# Altium PCB Controller_PCB_doc.PcbDoc
Units mm, origin at the board's own origin, x right, y up, seen from the top; angles counter-clockwise.
Board outline 152.4 x 101.6 mm, 2 copper layers (Top Layer, Bottom Layer); 35 components, 21 nets, 141 pads, 11 vias.
Unrouted connection lines stored in the file: 5.
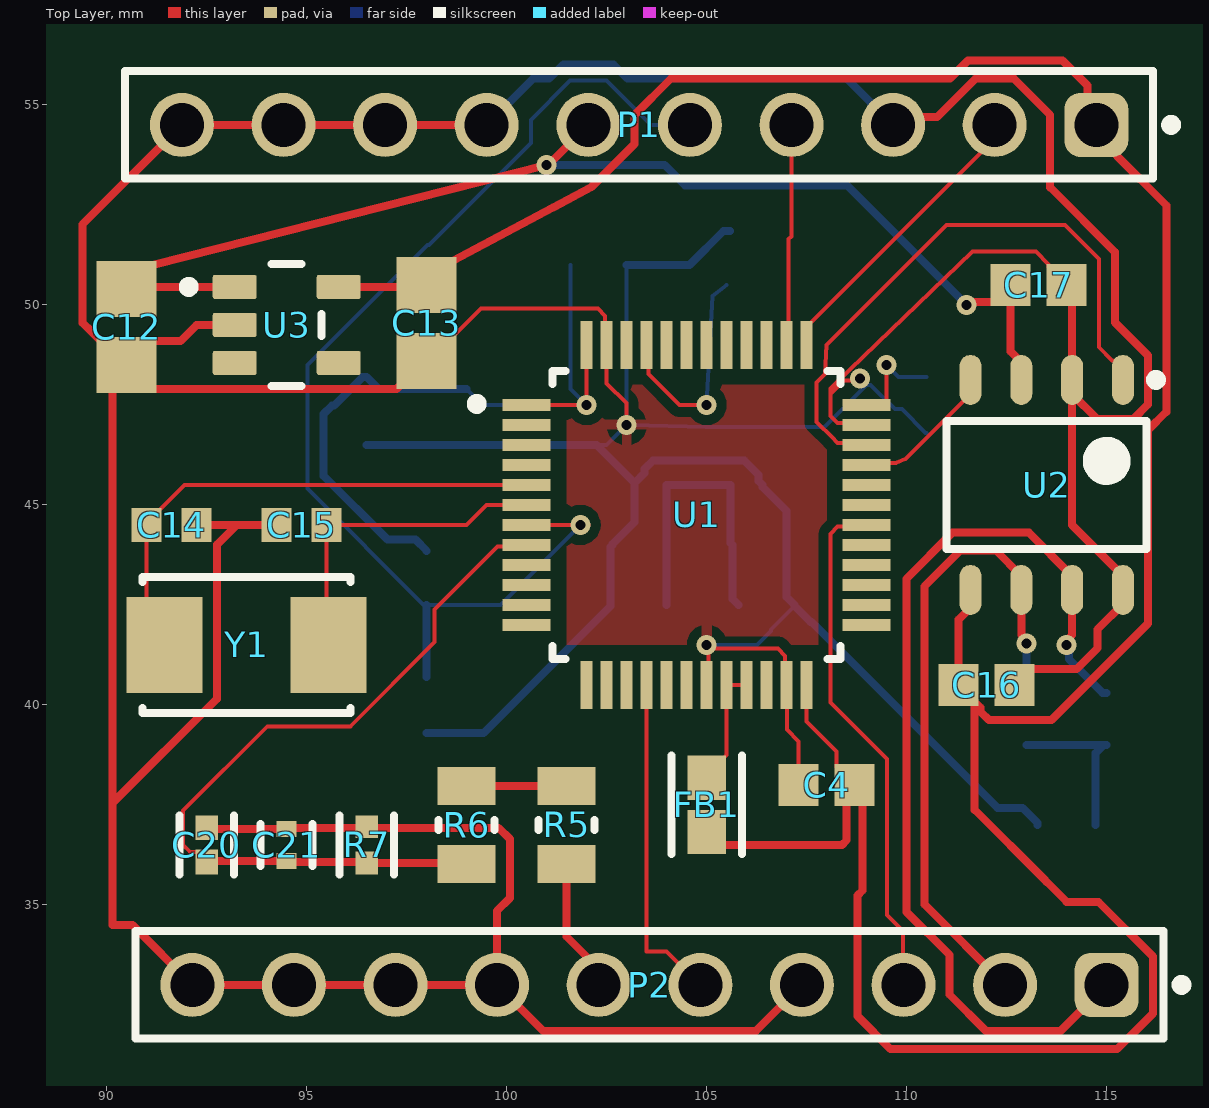
[diagram p0: Top Layer view]
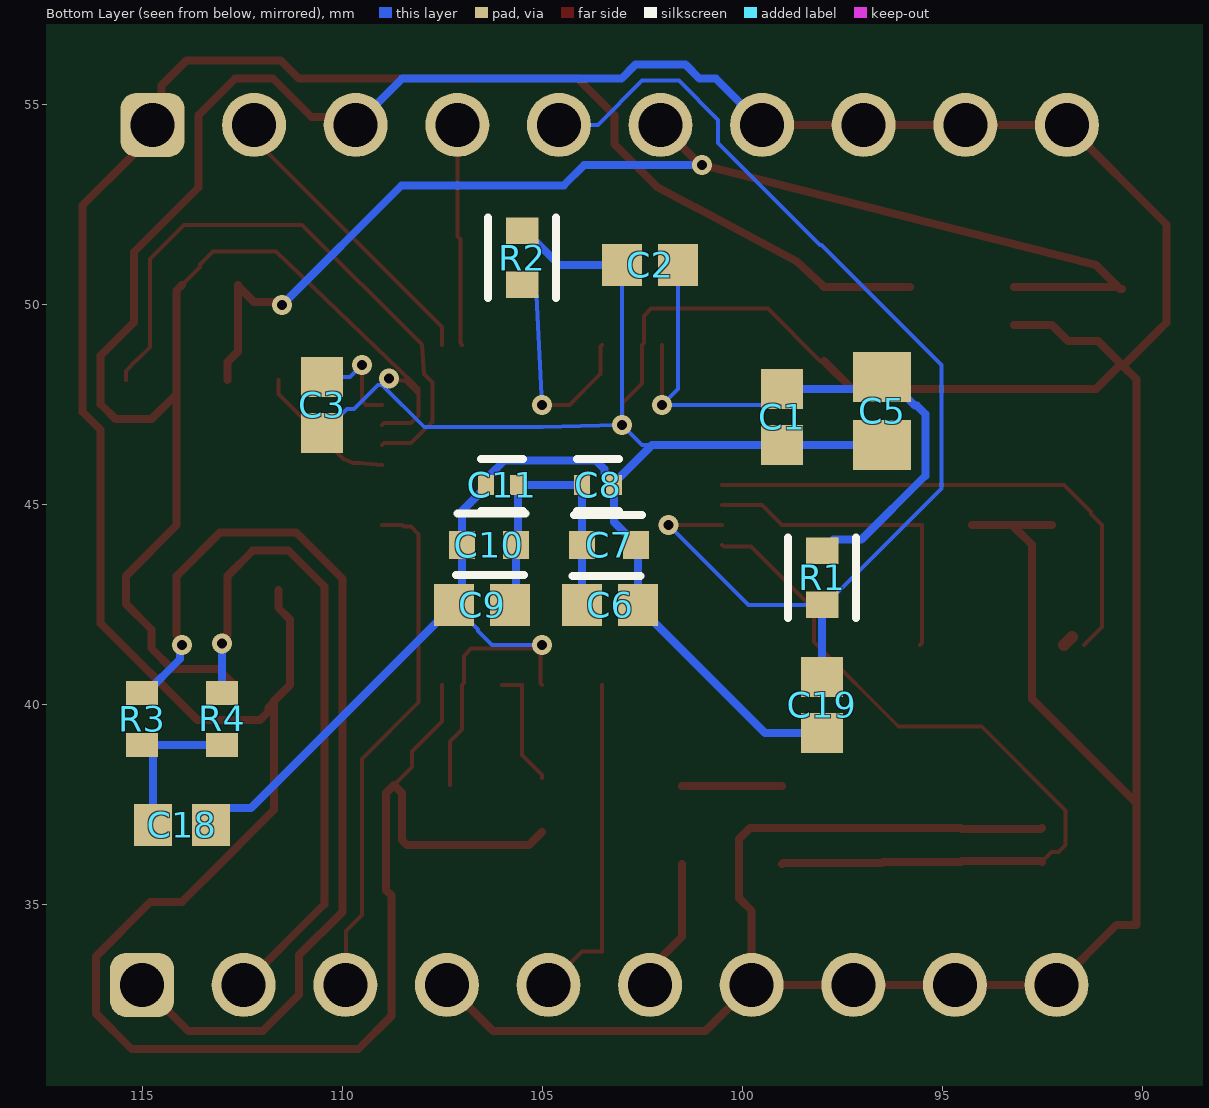
[diagram p1: Bottom Layer view, seen from below]
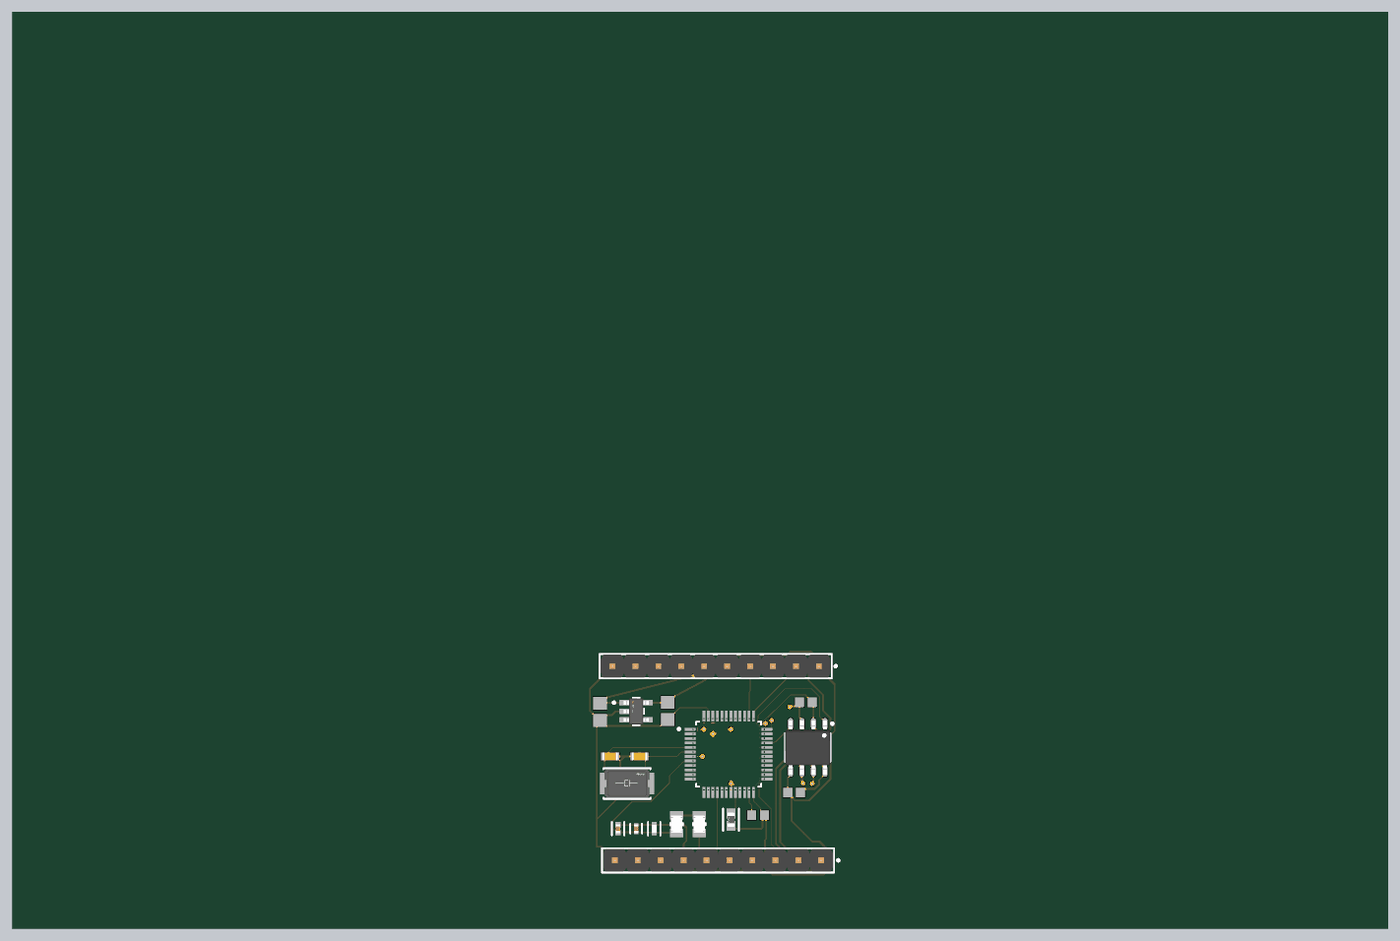
[diagram p2: 3D render of the assembled board from above, using the file's embedded part models]

## Layer stack, top to bottom
Top Solder: solder mask 0.0102, Solder Resist, Dk 3.5
Top Layer: signal copper 0.0356
Dielectric 1: dielectric 0.32, FR-4, Dk 4.8
Bottom Layer: signal copper 0.0356
Bottom Solder: solder mask 0.0102, Solder Resist, Dk 3.5

## Board outline
25.4,25.4 177.8,25.4 177.8,127 25.4,127

## Design rules (kind name [scope] priority, off if disabled: settings)
Clearance [All] p1: gap=0.254 ignorepadtopadclearanceinfootprint=FALSE except(0.05: SMDPad-SMDPad)
PolygonConnect [All] p1: connectstyle=Relief reliefconductorwidth=0.254 reliefentries=4 polygonreliefangle="90 Angle" airgapwidth=0.254
RoutingVias [All] p1: holewidth=0.711 width=1.27 viastyle="Through Hole" minholewidth=0.711 minwidth=1.27 maxholewidth=0.711 maxwidth=1.27
SolderMaskExpansion [All] p1: expansion=0.102 istentingtop=FALSE
UnRoutedNet [All] p1: checkbadconnections=TRUE
Width [All] p1: maxlimit=0.254 minlimit=0.1 preferedwidth=0.2 minimp=50.000000 maximp=50.000000 favimp=50.000000
29 further rules are at their usual default settings.

## Components (designator, comment, footprint, x,y, rotation, side; value= is the part's Value field where it differs from the comment)
C1 "GRM188R71C104KA01D" MURA-0603_H_0.9_M 99,47.2 r90 bottom
C2 "GRM188R71C104KA01D" MURA-0603_H_0.9_M 102.3,51 r180 bottom
C3 "GRM188R71C104KA01D" MURA-0603_H_0.9_M 110.5,47.5 r90 bottom
C4 "GRM188R71C104KA01D" MURA-0603_H_0.9_M 108,38 r0 top
C5 "GRM21BR61A475KA73L" CAPC2013X140X45NL15T25 96.5,47.35 r90 bottom
C6 "GRM188R71C104KA01D" MURA-0603_H_0.9_M 103.3,42.5 r0 bottom
C7 "GRM188R60J105KA01D" FP-GRM188-0_1-MFG 103.325,44 r180 bottom
C8 "10nF" FP-GCM155-0_05-MFG 103.6,45.5 r180 bottom
C9 "GRM188R71C104KA01D" MURA-0603_H_0.9_M 106.5,42.5 r180 bottom
C10 "GRM188R60J105KA01D" FP-GRM188-0_1-MFG 106.325,44 r0 bottom
C11 "10nF" FP-GCM155-0_05-MFG 106,45.5 r0 bottom
C12 "GRM21BR61A106KE19L" MURA-0805_H_1.35_M 90.5,49.45 r90 top
C13 "GRM21BR61A106KE19L" MURA-0805_H_1.35_M 98,49.55 r90 top
C14 "GRM1885C1H180JA01D" CAPC1608X90X35LL10T15 91.625,44.5 r180 top
C15 "GRM1885C1H180JA01D" CAPC1608X90X35LL10T15 94.875,44.5 r0 top
C16 "GRM188R71C104KA01D" MURA-0603_H_0.9_M 112,40.5 r180 top
C17 "GRM188R71C104KA01D" MURA-0603_H_0.9_M 113.3,50.5 r180 top
C18 "GRM188R71H472KA01D" CAPC1608X90X35ML10T15 114,37 r180 bottom
C19 "GRM188R71C104KA01D" MURA-0603_H_0.9_M 98,40 r90 bottom
C20 "1nF" FP-GRM155-0_05-IPC_B 92.5,36.5 r90 top
C21 "10nF" FP-GCM155-0_05-MFG 94.5,36.5 r90 top
FB1 "BLM18AG121SN1D" FP-BLM18-0_15-t0_8-IPC_B 105,37.5 r270 top
P1 "61301011121" 61301011121 103.31,54.5 r180 top
P2 "61301011121" 61301011121 103.57,33 r180 top
R1 "RC0603FR-0710KL" FP-RC0603-0_55-IPC_C 98,43.177 r270 bottom
R2 "RC0603FR-0710KL" FP-RC0603-0_55-IPC_C 105.5,51.177 r90 bottom
R3 "RC0603FR-0759RL" RESC1608X55X25LL10T15 115,39.65 r270 bottom
R4 "RC0603FR-0759RL" RESC1608X55X25LL10T15 113,39.65 r270 bottom
R5 "100K" FP-CRCW0805-e3-MFG 101.5,37 r90 top
R6 "100K" FP-CRCW0805-e3-MFG 99,37 r270 top
R7 "4.7K" FP-CRCW0402-e3-IPC_B 96.5,36.5 r90 top
U1 "STM32G474CET6" FP-STM32G474CET6-MFG 104.75,44.75 r0 top
U2 "TJA1051T/3,118" NXP-SOIC-8_L 113.5,45.5 r270 top
U3 "TPS7A2033PDBVR" FP-DBV0005A-MFG 94.5,49.5 r0 top
Y1 "ABM3-24.000MHZ-B2-T" FP-ABM3-MFG 93.5,41.5 r0 top

## Footprints (in the part's own frame and the unit in brackets; to place one, negate y for a bottom-side part, rotate by r counter-clockwise, add the part's x,y. Pads: shape width x height; smd on the part's side, far side on the other; paste and mask are expansions set on the pad)
61301011121 [mm] "Pin Header, pitch 2.54 mm, THT, Vertical, single row, 10p"
  rrect50% 1.6x1.6 hole 1.1: 1(-11.43,0)
  round 1.6 hole 1.1: 2(-8.89,0) 3(-6.35,0) 4(-3.81,0) 5(-1.27,0) 6(1.27,0) 7(3.81,0) 8(6.35,0) 9(8.89,0) 10(11.43,0)
  silkscreen extent -13.42,-1.35 12.85,1.35, body extent -12.7,-1.27 12.7,1.27, height 8.57
CAPC1608X90X35LL10T15 [mm] "Chip Capacitor, 2-Leads, Body 1.7x0.9mm, IPC High Density"
  rect 0.75x0.85 smd: 1(-0.625,0) 2(0.625,0)
  body extent -0.85,-0.45 0.85,0.45, height 0.9
CAPC1608X90X35ML10T15 [mm] "Chip Capacitor, 2-Leads, Body 1.60x0.80mm, IPC Low Density"
  rect 0.95x1.05 smd: 1(-0.725,0) 2(0.725,0)
  body extent -0.85,-0.45 0.85,0.45, height 0.9
CAPC2013X140X45NL15T25 [mm] "Chip Capacitor, 2-Leads, Body 2.00x1.25mm, IPC Medium Density"
  rect 1.25x1.45 smd: 1(-0.85,0) 2(0.85,0)
  body extent -1.08,-0.7 1.07,0.7, height 1.4
FP-ABM3-MFG [mm]
  rect 1.9x2.4 smd paste+0 mask+0: 1(-2.05,0) 2(2.05,0)
  silkscreen extent -2.6,-1.7 2.6,1.7, body extent -3.1,-1.8 3.1,1.8, height 0.25
FP-BLM18-0_15-t0_8-IPC_B [mm]
  rect 1.106x0.958 smd paste+0 mask+0: 1(-0.676,0) 2(0.676,0)
  silkscreen extent -1.23,-0.88 1.23,0.88, body extent -0.8,-0.4 0.8,0.4, height 0.95
FP-CRCW0402-e3-IPC_B [mm]
  rect 0.568x0.572 smd paste+0 mask+0: 1(-0.452,0) 2(0.452,0)
  silkscreen extent -0.74,-0.69 0.74,0.69, body extent -0.89,-0.44 0.89,0.44, height 0.25
FP-CRCW0805-e3-MFG [mm]
  rect 0.95x1.45 smd paste+0 mask+0: 1(-0.975,0) 2(0.975,0)
  silkscreen extent -0.13,-0.7 0.13,0.7, body extent -1.55,-0.82 1.55,0.82, height 0.25
FP-DBV0005A-MFG [mm]
  rrect17% 1.1x0.6 smd paste+0 mask+0: 1(-1.3,0.95) 2(-1.3,0) 3(-1.3,-0.95) 4(1.3,-0.95) 5(1.3,0.95)
  silkscreen extent -2.57,-1.53 0.87,1.53, body extent -1.95,-1.78 1.95,1.78, height 0.25
FP-GCM155-0_05-MFG [mm]
  rect 0.4x0.5 smd paste+0 mask+0: 1(-0.4,0) 2(0.4,0)
  silkscreen extent -0.53,-0.65 0.53,0.65, body extent -0.5,-0.25 0.5,0.25, height 0.55
FP-GRM155-0_05-IPC_B [mm]
  rect 0.615x0.572 smd paste+0 mask+0: 1(-0.429,0) 2(0.429,0)
  silkscreen extent -0.74,-0.69 0.74,0.69, body extent -0.89,-0.44 0.89,0.44, height 0.25
FP-GRM188-0_1-MFG [mm]
  rect 0.65x0.7 smd paste+0 mask+0: 1(-0.675,0) 2(0.675,0)
  silkscreen extent -0.91,-0.78 0.82,0.75, body extent -0.8,-0.4 0.8,0.4, height 0.9
FP-RC0603-0_55-IPC_C [mm]
  rect 0.659x0.812 smd paste+0 mask+0: 1(-0.677,0) 2(0.677,0)
  silkscreen extent -1.01,-0.85 1.01,0.85, body extent -0.8,-0.4 0.8,0.4, height 0.55
FP-STM32G474CET6-MFG [mm]
  rect 1.2x0.3 smd paste+0 mask+0: 1(-4.25,2.75) 2(-4.25,2.25) 3(-4.25,1.75) 4(-4.25,1.25) 5(-4.25,0.75) 6(-4.25,0.25) 7(-4.25,-0.25) 8(-4.25,-0.75) 9(-4.25,-1.25) 10(-4.25,-1.75) 11(-4.25,-2.25) 12(-4.25,-2.75) 25(4.25,-2.75) 26(4.25,-2.25) 27(4.25,-1.75) 28(4.25,-1.25) 29(4.25,-0.75) 30(4.25,-0.25) 31(4.25,0.25) 32(4.25,0.75) 33(4.25,1.25) 34(4.25,1.75) 35(4.25,2.25) 36(4.25,2.75)
  rect 0.3x1.2 smd paste+0 mask+0: 13(-2.75,-4.25) 14(-2.25,-4.25) 15(-1.75,-4.25) 16(-1.25,-4.25) 17(-0.75,-4.25) 18(-0.25,-4.25) 19(0.25,-4.25) 20(0.75,-4.25) 21(1.25,-4.25) 22(1.75,-4.25) 23(2.25,-4.25) 24(2.75,-4.25) 37(2.75,4.25) 38(2.25,4.25) 39(1.75,4.25) 40(1.25,4.25) 41(0.75,4.25) 42(0.25,4.25) 43(-0.25,4.25) 44(-0.75,4.25) 45(-1.25,4.25) 46(-1.75,4.25) 47(-2.25,4.25) 48(-2.75,4.25)
  silkscreen extent -5.62,-3.6 3.6,3.6, body extent -4.95,-4.95 4.95,4.95, height 0.25
MURA-0603_H_0.9_M [mm] "SMD, 2-Leads, Body 1.7x0.9mm, IPC Low Density"
  rect 1x1.05 smd: 1(-0.7,0) 2(0.7,0)
  body extent -0.85,-0.45 0.85,0.45, height 0.9
MURA-0805_H_1.35_M [mm] "SMD, 2-Leads, Body 2.1x1.35mm, IPC Low Density"
  rect 1.4x1.5 smd: 1(-0.95,0) 2(0.95,0)
  body extent -1.05,-0.67 1.05,0.67, height 1.35
NXP-SOIC-8_L [mm] "SOIC, 8-Leads, Body 5x4mm, Pitch 1.27mm, IPC High Density"
  oval 1.25x0.55 smd: 1(-2.625,1.905) 2(-2.625,0.635) 3(-2.625,-0.635) 4(-2.625,-1.905) 5(2.625,-1.905) 6(2.625,-0.635) 7(2.625,0.635) 8(2.625,1.905)
  silkscreen extent -2.75,-2.5 1.6,2.86, body extent -3,-2.5 3,2.5, height 1.75
RESC1608X55X25LL10T15 [mm] "Chip Resistor, 2-Leads, Body 1.60x0.80mm, IPC High Density"
  rect 0.6x0.8 smd: 1(-0.65,0) 2(0.65,0)
  body extent -0.85,-0.45 0.85,0.45, height 0.55

## Part data
C1 C2 C3 C4 C6 C9 C16 C17 C19: library part CMP-2000-05253-1, "CAP, Ceramic, 0.1 uF, 10%, 16 V, 0603, RoHS, Tape and Reel", Capacitance=0.1uF, Capacitance - nF=100nF, Capacitance - pF=100000pF, Case Code - in=0603, Case Code - mm=1608, Case Height=0.8mm, Case Length=1.6mm, Dielectric=X7R, Manufacturer=Murata, Maximum Operating Temperature=+125C, Minimum Operating Temperature=-55C, Operating Temperature Range=-55Cto+125C, Package / Case=0603(1608metric), Temperature Coefficient / Code=+/-15%, Tolerance=10%, Voltage Rating=16V, Brand=MurataElectronics, Case Width=0.8mm, Datasheet URL=https://datasheet.ciiva.com/29202/451467-da-01-en-vs-kondensator-0603-29202287.pdf, Datasheet Version=Dec-10, Dimensions=0.8mmWx1.6mmLx0.8mmH, Factory Pack Quantity=4000, Manufacturer URL=http://www.murata.com/, Packaging=Reel, Product=GeneralTypeMLCCs, Product Category=MultilayerCeramicCapacitorsMLCC-SMD/SMT, RoHS=Details, Series=GRM, Termination Style=SMD/SMT, Type=GeneralPurposeMLCC, Voltage Rating DC=16V
C5: library part CMP-2007-03391-1, Manufacturer=Murata, Part Number=GRM21BR61A475KA73L
C7 C10: library part CMP-2006-02790-2, "CAP CER 1UF 6.3V X5R 0603", Capacitance=1uF, Case Code (Imperial)=0603, Case Code (Metric)=1608, Dielectric=X5R, Dielectric Material=Ceramic, Insulation Resistance=500MR, Max Operating Temperature=85°C, Min Operating Temperature=-55°C, Package Quantity=1, Tolerance=10%, Voltage=6.3V, Case/Package=0603, Depth=0.8mm, Height=0.8mm, Lead Free="Lead Free", Length=1.6mm, Mount="Surface Mount", Packaging="Tape and Reel", Radiation Hardening=No, REACH SVHC="No SVHC", Termination=SMD/SMT, Thickness=0.035inch, Voltage Rating=6.3V, Voltage Rating (DC)=6.3V, Width=0.031inch
C8 C11 C21: library part CMP-06035-012129-1, "Ceramic Capacitor for Automotive 10nF ±20% 50VDC X7R 0402 Paper T/R"
C12 C13: library part CMP-2000-05254-1, "CAP, Ceramic, 10 uF, 10%, 10 V, 0805, RoHS, Tape and Reel", Capacitance=10µF, Manufacturer=Murata, Operating Temperature=-55degC~85degC, Package / Case=0805(2012Metric), Package Description="2-Pin Surface Mount Device (0805), Body 2.1 x 1.35 mm", Package Reference=805, Ratings=-, Standard Package=1, Temperature Coefficient=X5R, Tolerance=±10%, Voltage - Rated=10V, Applications=GeneralPurpose, Catalog Drawings=GRMSeries_0805_1.25, Category=Capacitors, Datasheet URL=https://datasheet.ciiva.com/3777/210grm21br61a106ke1923-3777175.pdf, Datasheet Version=Aug-14, Family=CeramicCapacitors, Featured Product=GA3SafetyRecognizedCapsandHi-CapMLCC, Features=-, Height - Seated (Max)=-, Lead Spacing=-, Lead Style=-, Manufacturer URL=http://www.murata.com/, Mounting Type=SurfaceMount,MLCC, Online Catalog=GRMSeries, Other Names=490-1709-6, Packaging=Digi-Reel, Product Training Modules=High-CapMultilayerCeramicCapacitors, Series=GRM, Size / Dimension="0.079\"Lx0.049\"W(2.00mmx1.25mm)", Thickness (Max)="0.053\"(1.35mm)"
C14 C15: library part CMP-2000-06334-1, "Chip Capacitor, 18 pF, +/- 5%, 50 V, -55 to 125 degC, 0603 (1608 Metric), RoHS, Tape and Reel", Capacitance=18pF, Manufacturer=Murata, Operating Temperature=-55°C~125°C, Package / Case=0603(1608Metric), Package Description="2-Pin Surface Mount Device, Body 1.6 x 0.8 mm", Package Reference=0603, Ratings=-, Standard Package=4,000, Temperature Coefficient=C0G,NP0, Tolerance=±5%, Voltage - Rated=50V, Applications=GeneralPurpose, Category=Capacitors, Datasheet URL=http://search.murata.co.jp/Ceramy/image/img/A01X/G101/ENG/GRM1885C1H180JA01-01.pdf, Datasheet Version=03/2016, Family=CeramicCapacitors, Features=-, Height - Seated (Max)=-, Lead Spacing=-, Lead Style=-, Manufacturer URL=http://www.murata.com/, Mounting Technology=SurfaceMount, Mounting Type=SurfaceMount,MLCC, Online Catalog=GRMSeries, Other Names=490-1409-2GRM39C0G180J050AD, Packaging=Tape&Reel(TR), Series=GRM, Size / Dimension="0.063\"Lx0.031\"W(1.60mmx0.80mm)", Thickness (Max)="0.035\"(0.90mm)"
C18: library part CMP-2006-02924-1, Manufacturer=Murata, Part Number=GRM188R71H472KA01D
C20: library part CMP-2008-04254-2, "Chip Multilayer Ceramic Capacitors for General Purpose, 0402, 1000pF, C0G, 30ppm/°C, 5%, 50V", Case Code (Imperial)=0402, Case Code (Metric)=1005, Dielectric=C0G, Dielectric Material=Ceramic, Insulation Resistance=10GR, Max Operating Temperature=125°C, Min Operating Temperature=-55°C, Package Quantity=1, Temperature Coefficient=30ppm/°C, Tolerance=5%, Voltage=50V, Capacitance=1nF, Case/Package=0402, Depth=0.5mm, Height=0.5mm, Lead Free="Lead Free", Length=1mm, Material=Ceramic, Mount="Surface Mount", Number of Pins=2, Packaging="Tape and Reel", Radiation Hardening=No, REACH SVHC="No SVHC", Termination=SMD/SMT, Thickness=0.022inch, Voltage Rating=50V, Voltage Rating (DC)=50V, Width=0.5mm
FB1: library part CMP-0686-00439-3, "Chip Ferrite Bead, 0603, 120Ω @ 100MHz, 0.18Ω, 25%, 800mA", Case Code (Imperial)=0603, Case Code (Metric)=1608, Current Rating=500mA, DC Resistance (DCR)=180mR, Frequency=100MHz, Max Operating Temperature=125°C, Min Operating Temperature=-55°C, Package Quantity=1, Tolerance=25%, Case/Package=0603, Core Material=Ferrite, DC Current=500mA, DC Resistance-Max=180mR, Depth=0.8mm, Height=0.8mm, Impedance=120R, Lead Free="Lead Free", Length=1.6mm, Material=Steel, Max Current Rating=500mA, Max DC Current=500mA, Military Standard=Not, Number of Circuits=1, Number of Lines=1, Number of Pins=2, Packaging="Tape and Reel", Radiation Hardening=No, REACH SVHC="No SVHC", RoHS Compliant=Yes, Series=BLM18A, Shielding=Unshielded, Termination=SMD/SMT, Test Frequency=100MHz, Width=0.8mm
P1 P2: library part CMP-1502-01082-6, "THT Vertical Pin Header WR-PHD, Pitch 2.54 mm, Single Row, 10 pins", Color=Black, Contact Resistance=20mΩ, Current Rating=3A, Flammability Rating="UL94 V-0", Insulation Resistance=1GΩ, Max Operating Temperature=105°C, Min Operating Temperature=-40°C, Operating Supply Voltage=250V, Connector Type="Male Pin", Contact Gender=Male, Contact Material=Gold, Contact Mating Length=5.9944mm, Contact Plating=Gold, Gender=Male, Height=8.74mm, Housing Material=PBT, Lead Pitch=2.54mm, Length=2.54mm, Mount="Through Hole", Number Of Contacts=10, Number of Pins=10, Number of Positions=10, Number Of Rows=1, Orientation=Vertical, Packaging=Bulk, Pitch=2.54mm, RoHS=Compliant, Termination=Solder, Voltage Rating=250V, Width=25.4mm
R1 R2: library part CMP-2100-03664-2, "RES 10K OHM 1% 1/10W 0603", Case Code (Imperial)=0603, Case Code (Metric)=1608, Max Operating Temperature=155°C, Max Power Dissipation=100mW, Min Operating Temperature=-55°C, Resistance=10kR, Resistance Tolerance=1%, Resistor Type="Thick Film", Temperature Coefficient=100ppm/°C, Voltage Rating=75V, Voltage Rating (DC)=50V, Case/Package=0603, Construction=Rectangular, Depth=0.8mm, Features="Moisture Resistant", Height=0.45mm, Lead Free="Lead Free", Lead Pitch=0.3mm, Length=1.6mm, Military Standard=Not, Number of Pins=2, Number of Terminations=2, Packaging="Tape and Reel", Power Rating=100mW, RoHS Compliant=Yes, Series=RC, Size Code=0603, Termination=SMD/SMT, Tolerance=1%, Weight=7.1E-05oz, Width=0.8mm
R3 R4: library part CMP-2000-04090-1, Manufacturer=Yageo, Part Number=RC0603FR-0759RL
R5 R6: library part CMP-2001-04899-2, "RES Thick Film, 100kΩ, 1%, 0.125W, 100ppm/°C, 0805", Case Code (Imperial)=0805, Case Code (Metric)=2012, Max Operating Temperature=155°C, Min Operating Temperature=-55°C, Package Quantity=5000, Power Rating=125mW, Resistance=100kR, Temperature Coefficient=100ppm/°C, Tolerance=1%, Voltage Rating=150V, Case/Package=0805, Composition="Thick Film", Contact Plating=Tin, Depth=1.25mm, Height=0.45mm, Lead Free="Lead Free", Length=2mm, Military Standard=Not, Mount="Surface Mount", Number of Pins=2, Packaging="Tape and Reel", Radiation Hardening=No, Termination=SMD/SMT, Voltage Rating (DC)=150V, Weight=0.000194oz, Width=1.25mm
R7: library part CMP-2002-00051-3, "RES Thick Film, 4.7kΩ, 1%, 0.063W, 100ppm/°C, 0402", Case Code (Imperial)=0402, Case Code (Metric)=1005, Max Operating Temperature=155°C, Max Power Dissipation=63mW, Min Operating Temperature=-55°C, Package Quantity=10, Resistance=4.7kR, Temperature Coefficient=100ppm/°C, Tolerance=1%, Voltage Rating=50V, Case/Package=0402, Composition="Thick Film", Contact Plating=Tin, Depth=0.5mm, Features="Automotive AEC-Q200", Height=0.35mm, Lead Free="Lead Free", Length=1mm, Military Standard=Not, Mount="Surface Mount", Number of Terminations=2, Packaging="Tape and Reel", Power Rating=63mW, Radiation Hardening=No, Termination=SMD/SMT, Voltage Rating (DC)=50V, Weight=2.3E-05oz, Width=0.5mm
U1: library part CMP-12105-000053-1, "MAINSTREAM ARM CORTEX-M4 CORE WI", Ambient Temperature Range High=+85°C, Ambient Temperature Range Low=-40°C, Frequency=170MHz, Manufacturer=STMicroelectronics, Max Junction Temp=+105°C, Max Supply Voltage=3.6V, Min Supply Voltage=1.62V, Package=LQFP48, Temperature="-40°C to +85°C", Automotive=No, Category=IC, ComponentLink2Description=Datasheet, ComponentLink2URL=https://www.st.com/resource/en/datasheet/stm32g474ce.pdf, Core Architecture="ARM Cortex-M4", Data Bus Width=32bits, Device Class L1="Integrated Circuits (ICs)", Device Class L2="Embedded Processors and Controllers", Device Class L3=Microcontrollers, Digikey Description="MAINSTREAM ARM CORTEX-M4 CORE WI", Height=1.6mm, Interface=I2C,SPI,UART,USART,CAN,USB,LIN,IrDA,I2S,SMBus,Other, Lead Free=Yes, Manufacturer Part Number=STM32G474CET6, Memory Size=512KBytes, Memory Type=FLASH, Mouser Description="Cortex M4 512K LQFP48 85°C", Number Of A/D Converters=5, Number Of Adc Channels=20, Number Of Cores=1, Number Of I2C Channels=4, Number Of I/Os=38, Number Of Pwm Channels=12, Number Of Spi Channels=3, Number Of Timers/Counters=14, Number Of Uart Channels=4, Number Of Usb Channels=1, Octopart=https://octopart.com/stm32g474cet6-stmicroelectronics-99072248, Ram Size=128KBytes, RoHS=TRUE, Standoff Height=0.05mm, Temperature Range High=+85°C, Temperature Range Low=-40°C
U2: library part CMP-2000-07245-1, "High-Speed CAN Transceiver, 3 to 5 V, 8-Pin SOIC (SOT96-1), RoHS, Tape and Reel", Manufacturer=NXP, Operating Supply Voltage (Max)=5.5V, Operating Supply Voltage (Min)=4.5V, Operating Supply Voltage (Typ)=5V, Operating Temperature (Max)=125C, Operating Temperature (Min)=-40C, Operating Temperature Classification=Automotive, Package Description="8-Pin Small Outline Integrated Circuit, Body 4.9 x 3.9 mm, Pitch 1.27 mm", Package Reference=SOT96-1, Package Type=SO, Power Down Mode=Normal/Silent, Supply Current=70mA, Category=Transceiver, Data Rate=1Mbps, Datasheet URL=http://www.nxp.com/documents/data_sheet/TJA1051.pdf, Datasheet Version="Rev. 7, 01/2015", DELETED=Compliant, Manufacturer URL=http://www.nxp.com/, Mounting=SurfaceMount, Mounting Technology=SurfaceMount, Number of Transceivers=1, Packaging=TapeandReel, Pin Count=8, Rad Hardened=No, Standard Supported=ISO11898-2
U3: library part CMP-04917-000300-1, "IC REG LINEAR 3.3V 300MA SOT23-5", RoHS Compliant=Yes
Y1: library part CMP-27762-013604-1, "Crystal 24MHz ±20ppm 18pF SMD-2 5mm x 3.2mm", Case/Package=CSMD, ESR (Equivalent Series Resistance)=30R, Frequency=24MHz, Frequency Stability=50ppm, Frequency Tolerance=20ppm, Load Capacitance=18pF, Max Operating Temperature=70°C, Min Operating Temperature=-20°C, Operating Frequency="24 MHz", Package Quantity=1000, Resistor Type=Ceramic, Series Resistance=50R, Accuracy=20ppm, Depth=3.2mm, Height=0.051inch, Lead Free="Lead Free", Length=5mm, Mount="Surface Mount", Number of Pins=2, Packaging="Tape and Reel", Radiation Hardening=No, REACH SVHC=Yes, Series=ABM3, Termination=SMD/SMT, Tolerance=20ppm, Width=3.2mm

## Via types
v1: diameter 0.5, hole 0.25, Top Layer to Bottom Layer, 11 vias

## Nets (pads, with @x,y where several pads share a name; then routed paths per layer and width w, separated by ;. In a path a pad name is that pad's centre, name@x,y a point inside that pad or via, vN(x,y) a via of type N, cw(c..) or ccw(c..) an arc to the next point about the centre after c; other vN are vias at no path point)
3V3: C1.2 C2.2 C3.2 C4.2 C5.2 C13.2 C16.2 FB1.2 P1.1 R1.1 U1.1 U1.24 U1.36 U1.48 U2.5 U3.5 | length 97.5
  Top Layer w0.1: U1.1 v1(102,47.5) U1.48 ; U1.24 107.5,39.587 108.25,38.837 108.25,38.45 C4.2 ; U1.36 109.4,47.5 109.5,47.6 v1(109.5,48.5)
  Top Layer w0.2: U3.5 97.95,50.45 C13.2 98.65,51.1 101.158,52.432 ccw(c100.694,53.306) 101.163,52.435 102.123,52.951 103.194,54.022 103.194,54.746 104.102,55.654 111.08,55.654 111.534,56.108 113.892,56.108 114.517,55.483 114.517,54.723 P1.1 ; FB1.2 105.324,36.5 108.383,36.5 108.5,36.617 108.5,37.8 C4.2 108.9,37.8 108.9,35.365 108.766,35.232 108.766,32.222 109.596,31.392 115.258,31.392 116.154,32.288 116.154,33.712 114.789,35.078 114,35.078 113.5,35.578 113.441,35.636 111.7,37.378 C16.2@111.7,40.075 ; U2.5 111.595,42.43 111.3,42.135 C16.2 111.7,40.1 C16.2@111.7,40.075 ; P1.1@115.255,53.985 115.255,53.723 116.488,52.489 116.488,47.326 116.034,46.872 116.034,42.038 113.617,39.621 112.053,39.621 111.846,39.828 111.846,39.929 C16.2@111.7,40.075
  Bottom Layer w0.1: C1.2 99.4,47.5 v1(102,47.5) 101.6,47.9 C2.2 ; v1(109.5,48.5) 109.8,48.2 C3.2
  Bottom Layer w0.2: R1.1 97.721,44.133 97.017,44.133 95.421,45.728 95.421,47.272 95.628,47.479 95.679,47.479 96.4,48.2 C5.2 96.8,47.9 C1.2
5V: C12.2 C17.2 P1.6 U2.3 U3.1 U3.3 | length 30.8
  Top Layer w0.2: C12.2 90.55,50.4 C12.2@90.6,50.45 ; U3.1 C12.2@90.6,50.45 ; P1.6 101.04,53.5 v1(101,53.5) 91.15,51 C12.2@90.6,50.45 ; v1(111.5,50) 111.581,50 111.656,50.075 112.2,50.075 C17.2@112.6,50.475 ; C17.2 C17.2@112.6,50.475 ; U2.3 112.865,48.57 112.6,48.835 C17.2@112.6,50.475
  Bottom Layer w0.2: v1(101,53.5) 103.948,53.5 104.457,52.991 108.509,52.991 v1(111.5,50)
CANH: P2.1 R3.1 U2.7 | length 24.2
  Top Layer w0.2: v1(114,41.5) 114,41.608 114.135,41.743 U2.7 114.135,43.225 113.052,44.308 111.146,44.308 109.992,43.154 109.992,34.826 111.074,33.744 111.074,32.754 111.982,31.846 113.846,31.846 P2.1
  Bottom Layer w0.2: v1(114,41.5) 114.057,41.443 114.057,41.143 114.9,40.3 R3.1
CANL: P2.2 R4.1 U2.6 | length 16.8
  Top Layer w0.2: P2.2 110.446,35.014 110.446,42.966 111.334,43.854 112.236,43.854 112.865,43.225 U2.6 112.865,41.745 113,41.61 v1(113,41.529)
  Bottom Layer w0.2: R4.1 v1(113,41.529)
FDCAN_RX: U1.33 U2.4 | length 3.6
  Top Layer w0.1: U1.33 109.55,46.046 109.726,46.046 109.971,46.151 110.029,46.209 111.595,47.775 U2.4
FDCAN_TX: U1.34 U2.1 | length 15.2
  Top Layer w0.1: U1.34 108.954,46.546 108.274,46.546 108.128,46.692 107.771,47.048 107.742,47.077 107.742,48.062 107.954,48.274 108,49 108.029,49.029 111,52 113.955,52 114.804,51.151 114.804,48.941 115.137,48.608 115.15,48.608 115.405,48.353 U2.1
GND: C1.1 C2.1 C3.1 C4.1 C5.1 C6.1 C7.2 C8.2 C9.1 C10.2 C11.2 C12.1 C13.1 C14.1 C15.1 C16.1 C17.1 C18.2 C19.1 C20.2 C21.2 P1.3 P1.7 P1.8 P1.9 P1.10 P2.4 P2.7 P2.8 P2.9 P2.10 R2.2 R7.2 U1.19 U1.23 U1.35 U1.47 U2.2 U2.8 U3.2 | length 195.5
  Top Layer w0.1: C13.1@97.95,48.6 C13.1 98.05,48.6 99.354,49.904 102.276,49.904 102.454,49.726 102.454,49.046 U1.47 102.5,48.041 102.991,47.55 102.991,47.009 v1(103,47) ; U1.19 105.046,40.546 105.046,41.454 v1(105,41.5) ; v1@105.224,41.404 106.776,41.404 106.954,41.226 106.954,40.546 U1.23 107.004,40.496 107.004,39.384 107.3,39.087 C4.1 ; 108.231,48.051 108.096,47.915 108.096,47.776 ; 108.232,48.051 111.649,51.329 113.226,51.329 113.55,51.005 113.55,50.95 C17.1 ; v1(108.83,48.154) 108.786,48.11 108.43,48.11 108.096,47.776 ; U1.35 108.954,47.046 108.274,47.046 108.096,47.224 108.096,47.776
  Top Layer w0.2: C12.1@90.45,48.5 89.604,49.346 89.396,49.553 89.396,52.016 P1.10 P1.9 P1.8 P1.7 ; C12.1@90.475,48.475 90.146,48.146 90.146,37.545 ; C12.1 91.1,49.1 91.85,49.1 92.25,49.5 U3.2 ; C12.1@90.55,48.5 91.15,47.9 92.529,47.9 92.533,47.896 97.246,47.896 C13.1@97.95,48.6 ; C14.1 93.25,44.5 ; C20.2 92.529,36.9 C21.2 94.526,36.926 99.8,36.926 100.079,36.647 100.079,35.172 99.76,34.853 P2.7 ; C15.1 93.25,44.5 ; P2.4 106.226,31.846 100.914,31.846 P2.7 ; P1.3 109.852,54.692 110.76,54.692 111.722,55.654 112.678,55.654 113.586,54.746 113.586,52.94 115.208,51.318 115.208,49.562 116.034,48.736 116.034,47.514 115.666,47.146 114.764,47.146 U2.2@114.135,47.775 ; C16.1 113.096,40.896 114.25,40.896 114.77,41.416 114.77,41.89 115.405,42.525 115.405,43.225 114.135,44.495 U2.2@114.135,47.775 ; C17.1 114.135,50.365 U2.2 U2.2@114.135,47.775 ; 90.146,37.545 90.146,34.494 90.646,34.494 P2.10 P2.9 P2.8 P2.7 ; 90.146,37.545 92.754,40.153 92.754,44.004 93.25,44.5
  Bottom Layer w0.1: 102.25,46.5 102.5,46.5 v1(103,47) ; C2.1 v1(103,47) ; v1(105,41.5) 106.255,41.5 106.604,41.849 106.604,41.879 C9.1@107.2,42.475 ; v1(108.83,48.154) 108.846,48.154 v1@109,48 ; C3.1 110.475,46.8 109.879,47.396 109.704,47.396 109.1,48 v1@109,48 ; v1(103,47) 103.083,47 104.984,46.946 ccw(c105,47.5) 105.006,46.946 107.946,46.946 v1@109,48
  Bottom Layer w0.2: C5.1 C1.1 102.25,46.5 C8.2@103.2,45.55 ; C19.1 99.425,39.3 102.6,42.475 C6.1 102.6,43.95 C7.2 102.65,44.025 103.2,44.575 C8.2 C8.2@103.2,45.55 ; P1.7 100.654,55.654 101.061,55.654 101.415,56.008 102.665,56.008 103.019,55.654 108.506,55.654 P1.3 ; C2.1 104.57,51 105.423,51.853 R2.2 R2.2@105.577,51.853 ; C18.2 113.275,37.05 112.9,37.425 112.275,37.425 107.625,42.075 107.6,42.075 107.2,42.475 C9.1 107,42.7 C10.2 107,44.85 106.4,45.45 C11.2 106.3,45.6 106.3,45.751 105.947,46.104 103.653,46.104 103.446,45.897 103.446,45.796 C8.2@103.2,45.55
Imeas_IN: P2.5 U1.16 | length 8.3
  Top Layer w0.1: U1.16 103.5,33.84 104,33.84 P2.5
"MCU BOOT0": R2.1 U1.45 | length 5.7
  Top Layer w0.1: U1.45 103.546,48.954 103.546,48.274 104.32,47.5 v1(105,47.5)
  Bottom Layer w0.1: v1(105,47.5) 105.144,50.221 R2.1
"MCU NRST": C19.2 P1.5 R1.2 U1.7 | length 28.6
  Top Layer w0.1: U1.7 v1(101.844,44.5)
  Top Layer w0.2: v1(101.844,44.5) v1@102,44.5
  Bottom Layer w0.1: v1(101.844,44.5) 99.844,42.5 R1.2 97.923,42.5 95.017,45.406 95.017,48.497 98.017,51.497 98.058,51.497 100.604,54.043 100.604,54.625 101.583,55.604 102.497,55.604 103.601,54.5 P1.5
  Bottom Layer w0.2: C19.2 R1.2
MCU_VDDA_VREF: C6.2 C7.1 C8.1 C9.2 C10.1 C11.1 FB1.1 U1.20 U1.21 | length 10.7
  Top Layer w0.1: FB1.1 105,38.25 105.5,38.75 U1.20 U1.21
  Bottom Layer w0.2: C6.2 C7.1 C8.1 C11.1 105.6,44.05 C10.1 105.65,42.65 C9.2
NetC18_1: C18.1 R3.2 R4.2 | length 4.1
  Bottom Layer w0.2: R4.2 R3.2@114.925,39 ; C18.1 114.725,38.8 R3.2@114.925,39 ; R3.2 R3.2@114.925,39
NetR5_2: R5.2 R6.1 | length 2.5
  Top Layer w0.2: R6.1 R5.2
OPAMP_OUT: U1.9 U1.14
OSC_IN: C14.2 U1.5 Y1.1 | length 13.4
  Top Layer w0.1: Y1.1 91,41.95 C14.2 91.275,44.775 91.275,44.826 91.949,45.5 U1.5
  Top Layer w0.3: Y1.1@91.75,41.7 Y1.1@91.95,41.5
OSC_OUT: C15.2 U1.6 Y1.2 | length 8.2
  Top Layer w0.1: Y1.2 95.5,41.55 C15.2 99,44.5 99.5,45 U1.6
PWM_OUT: P2.3 U1.30 | length 13
  Top Layer w0.1: U1.30 108.496,44.5 108.45,44.454 108.274,44.454 108.096,44.276 108.096,40.059 109.504,38.651 109.504,34.743 109.904,34.343 109.904,33.016 P2.3
SWCLK: P1.4 U1.38 | length 5.5
  Top Layer w0.1: U1.38 107.046,49.046 107.046,51.642 107.12,51.716 P1.4
SWDIO: P1.2 U1.37 | length 7.4
  Top Layer w0.1: U1.37 107.5,49.45 112.2,54.15 P1.2
V_conv: P2.6 R5.1 | length 3.4
  Top Layer w0.2: R5.1 101.5,34.206 102.3,33.406 P2.6
Vmeas_IN: C20.1 C21.1 R6.2 R7.1 U1.8 | length 20
  Top Layer w0.1: C20.1 92.5,36.081 92.264,36.317 92.088,36.317 91.91,36.495 91.91,37.362 94.014,39.466 96.096,39.466 98.2,41.57 98.2,42.38 99.774,43.954 100.454,43.954 U1.8
  Top Layer w0.2: C20.1 92.529,36.1 C21.1 94.526,36.074 96.474,36.074 R7.1 98.977,36.048 R6.2
pads on no net: U1.2 U1.3 U1.4 U1.10 U1.11 U1.12 U1.13 U1.15 U1.17 U1.18 U1.22 U1.25 U1.26 U1.27 U1.28 U1.29 U1.31 U1.32 U1.39 U1.40 U1.41 U1.42 U1.43 U1.44 U1.46 U3.4

## Polygon pours and split planes (outlines as drawn)
GND on Top Layer "GND_L01_P000" (solid, pour order 0): 101.5,48 101.5,41.5 108,41.5 108,48